# EAGLE board ledboard2 (EAGLE 6.5.0)
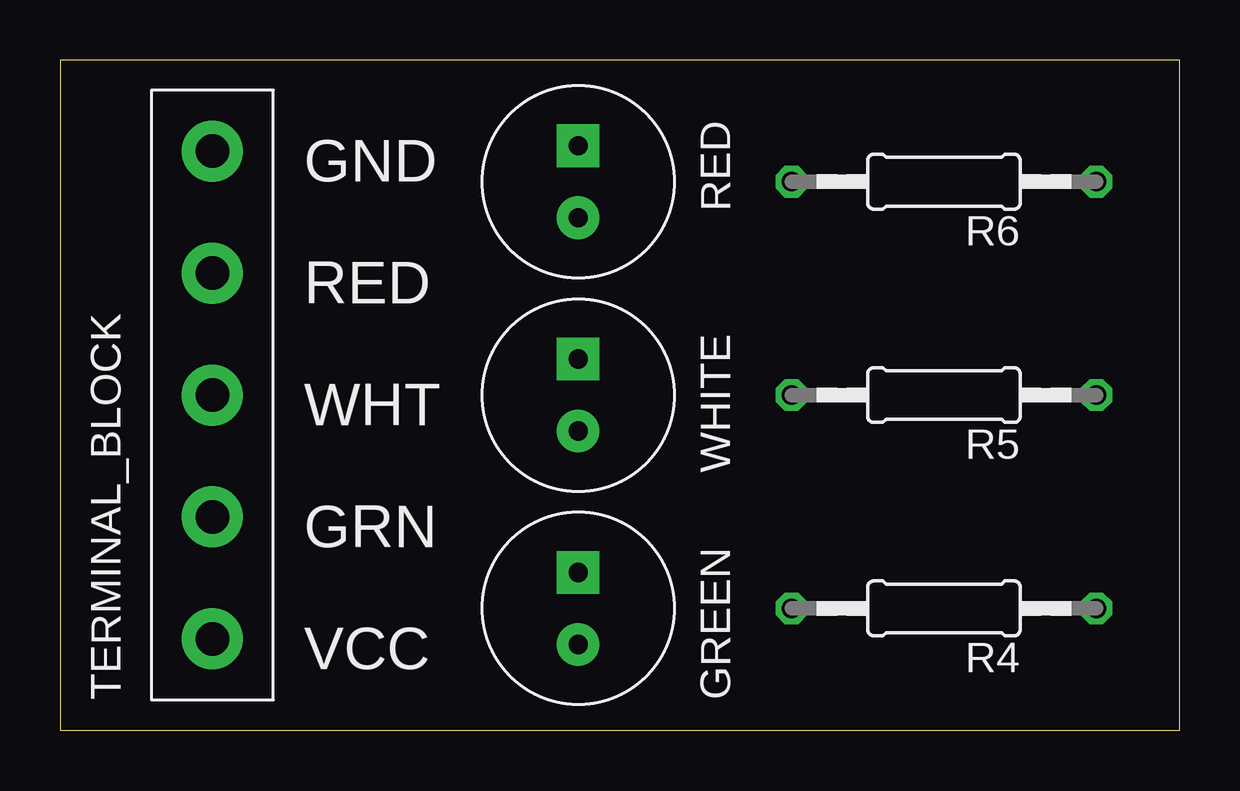
[diagram p0: board, top side]
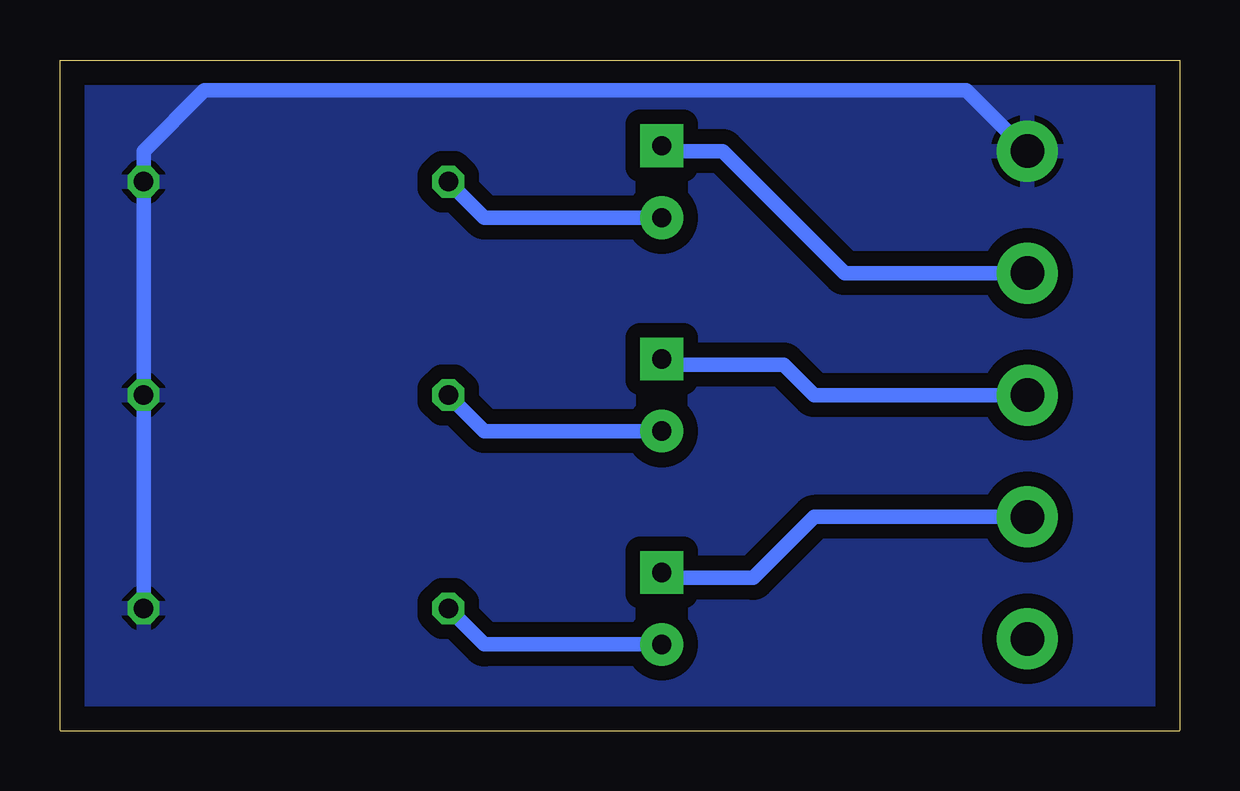
[diagram p1: board, bottom side, seen from below]

Size 46.66 x 27.94 mm. Coordinates in mm from the lower left corner, seen from the top.
Outline: 46.66,0.01 46.66,27.94 0,27.94 0,0.01
Outline: 46.66,0 0,0
Copper layers (1*16): Top 0.035mm / dielectric 1.5mm / Bottom 0.035mm
Design rules "default": minimum track width 10mil, minimum drill 24mil, track to track 8mil, track to pad 8mil, pad to pad 8mil, via to via 8mil, smd to smd 8mil, copper to edge 40mil, drill to drill 8mil, minimum pad ring 10mil, minimum via ring 8mil, stop-mask expansion 4mil, vias tented up to drill 0mil, thermal gap 10mil

## Footprints (pad centres in the part's own frame; a part is rotated, then mirrored left to right if it is on the bottom)
8MM_LED = drill 0.8 pad 1.778: NEG 1.5,0 | drill 0.8 pad 1.778 square: POS -1.5,0
0207/12 = drill 0.813 octagon: 1 -6.35,0; 2 6.35,0
1X5_3.5MM_TERMINAL_BLOCK = drill 1.4 pad 2.54: 1 -10.16,0; 2 -5.08,0; 3 0,0; 4 5.08,0; 5 10.16,0

## Placement (x,y rotation side)
GREEN  8MM_LED  [8MM_LED]  21.59,5.09 270 top
R4  83  [0207/12]  36.83,5.09 180 top
R5  83  [0207/12]  36.83,13.98 180 top
R6  83  [0207/12]  36.83,22.87 180 top
RED  8MM_LED  [8MM_LED]  21.59,22.87 270 top
TERMINAL_BLOCK  1X5_3.5MM_TERMINAL_BLOCK  [1X5_3.5MM_TERMINAL_BLOCK]  6.35,13.98 90 top
WHITE  8MM_LED  [8MM_LED]  21.59,13.98 270 top

## Library data of the parts
GREEN RED TERMINAL_BLOCK WHITE = e11
R4-R6 = resistor

## Nets
GND: R4.1 R5.1 R6.1 TERMINAL_BLOCK.5
N$1: RED.POS TERMINAL_BLOCK.4
N$2: TERMINAL_BLOCK.3 WHITE.POS
N$3: GREEN.POS TERMINAL_BLOCK.2
N$7: GREEN.NEG R4.2
N$8: R5.2 WHITE.NEG
N$9: R6.2 RED.NEG
VCC: TERMINAL_BLOCK.1

## Tracks (layer width: path | path; a pad name or v marks a point on that pad's centre or on a via)
GND
  Bottom 0.61: R4.1 R5.1 R6.1 43.18,24.14 40.64,26.68 8.89,26.68 TERMINAL_BLOCK.5
  pour Bottom (isolate 0.61): 0,27.95 0,0.01 46.99,0.01 46.99,27.95
N$1
  Bottom 0.61: TERMINAL_BLOCK.4 13.97,19.06 19.05,24.14 21.36,24.14 RED.POS
N$2
  Bottom 0.61: TERMINAL_BLOCK.3 15.24,13.98 16.51,15.25 21.36,15.25 WHITE.POS
N$3
  Bottom 0.61: TERMINAL_BLOCK.2 15.24,8.9 17.78,6.36 21.36,6.36 GREEN.POS
N$7
  Bottom 0.61: GREEN.NEG 28.98,3.59 R4.2
N$8
  Bottom 0.61: WHITE.NEG 28.98,12.48 R5.2
N$9
  Bottom 0.61: RED.NEG 28.98,21.37 R6.2

## Text on the board
tNames: GND | RED | WHT | GRN | VCC